# Altium PCB UZ_PER_loopback_tutorial.PcbDoc
Units mm, origin at the board's own origin, x right, y up, seen from the top; angles counter-clockwise.
Board outline 100 x 100 mm, 2 copper layers (Top Layer, Bottom Layer); 104 components, 84 nets, 343 pads, 0 vias.
Unrouted connection lines stored in the file: 133.
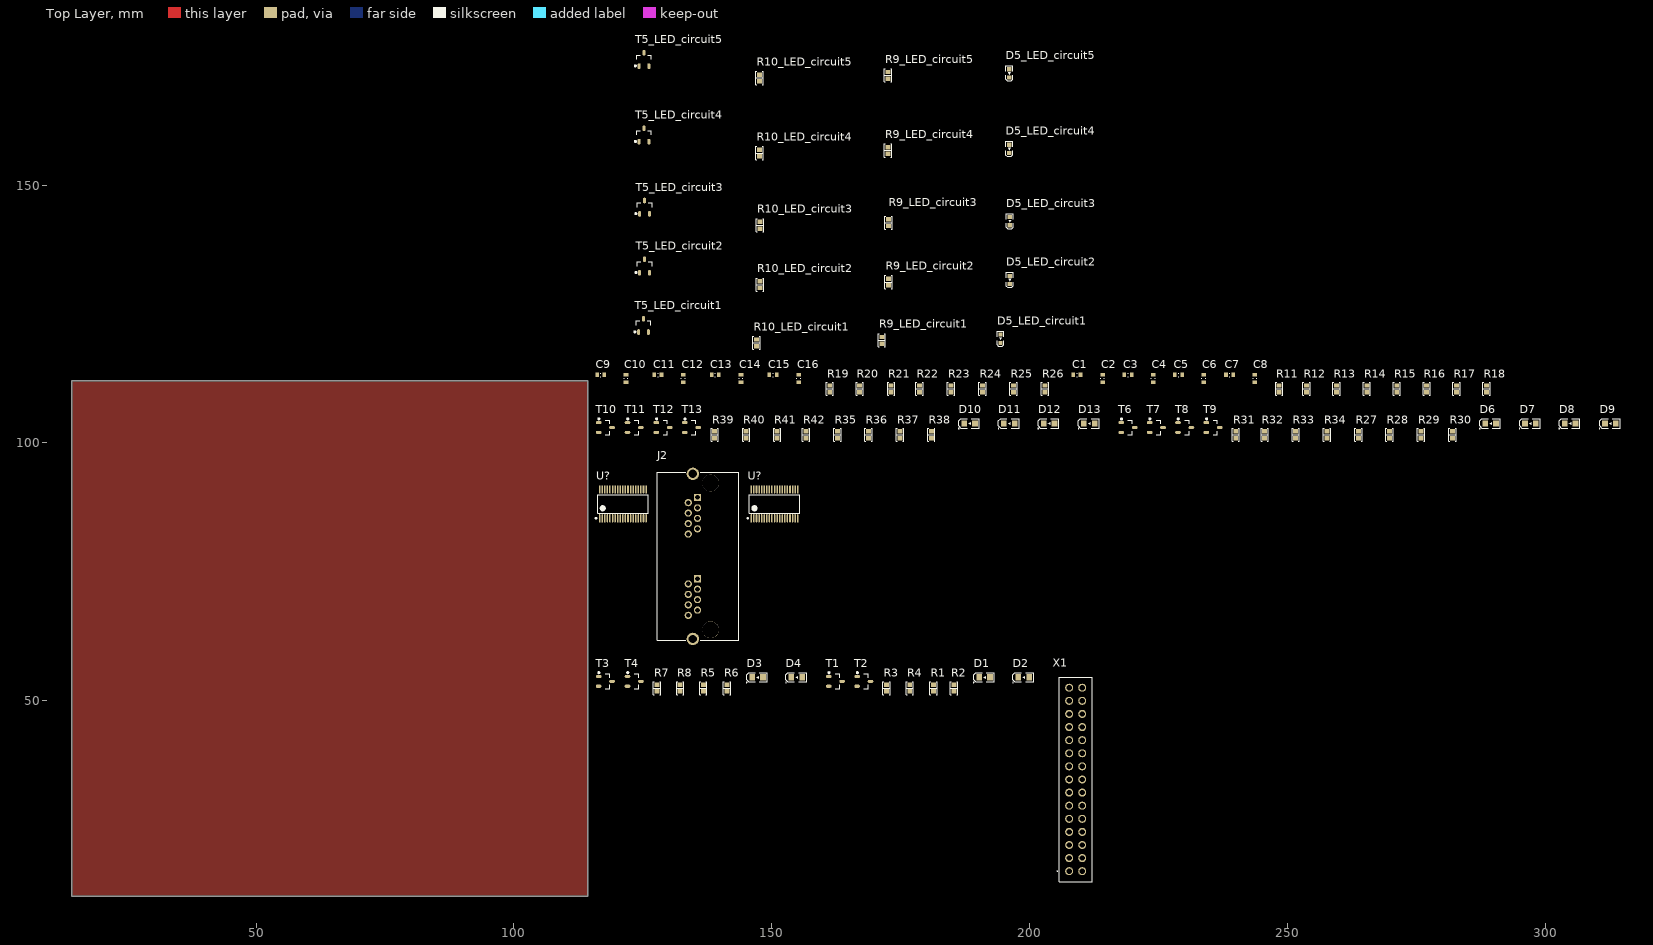
[diagram p0: Top Layer view]
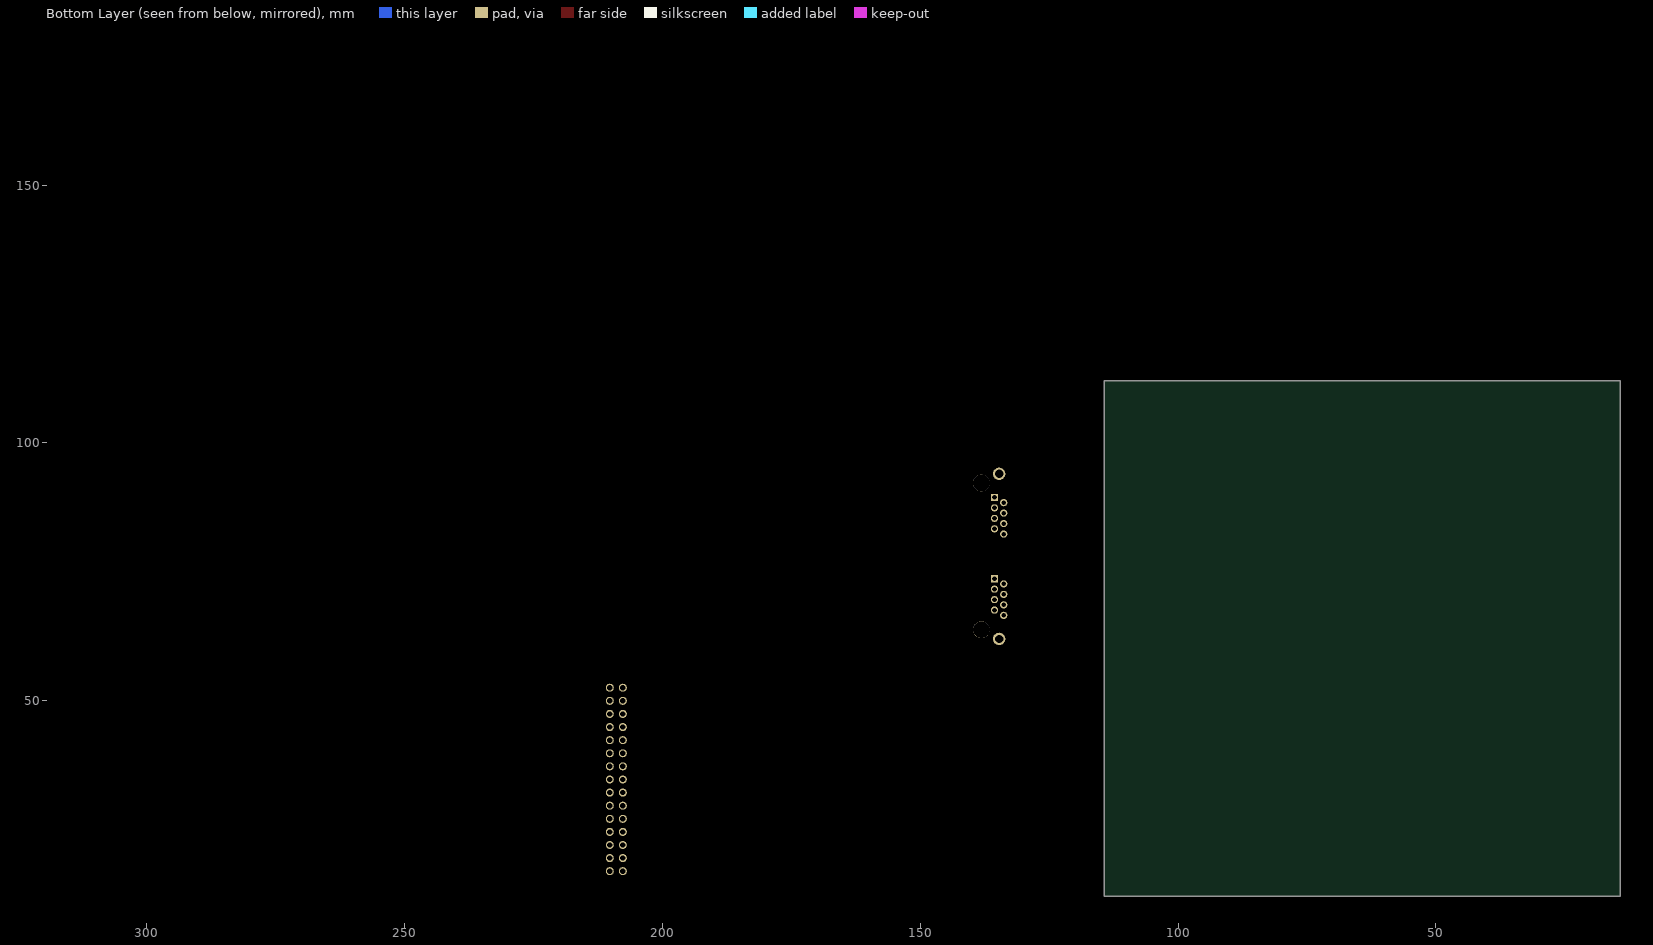
[diagram p1: Bottom Layer view, seen from below]

## Layer stack, top to bottom
Top Solder: solder mask 0.0102, Solder Resist, Dk 3.5
Top Layer: signal copper 0.0356
Dielectric 1: dielectric 0.32, FR-4, Dk 4.8
Bottom Layer: signal copper 0.0356
Bottom Solder: solder mask 0.0102, Solder Resist, Dk 3.5

## Board outline
14.3,12.1 114.3,12.1 114.3,112.1 14.3,112.1

## Design rules (kind name [scope] priority, off if disabled: settings)
BoardOutlineClearance [All] p1: gap=0.2 ignorepadtopadclearanceinfootprint=FALSE except(0.4: Arc-SplitBarrior Arc-SplitContinuation Track-SplitBarrior Track-SplitContinuation SMDPad-SplitBarrior SMDPad-SplitContinuation THPad-SplitBarrior THPad-SplitContinuation Via-SplitBarrior Via-SplitContinuation Fill-SplitBarrior Fill-SplitContinuation Poly-SplitBarrior Poly-SplitContinuation Region-SplitBarrior Region-SplitContinuation Text-SplitBarrior Text-SplitContinuation)
Clearance "Clearance Bottom Layer" [OnLayer('Bottom Layer')] p1: gap=0.203 ignorepadtopadclearanceinfootprint=TRUE except(0.254: Arc-Text Track-Text SMDPad-Text THPad-Text Via-Text Fill-Text Poly-Text Region-Text Text-Text)
Clearance "Clearance Top Layer" [OnLayer('Top Layer')] p2: gap=0.203 ignorepadtopadclearanceinfootprint=TRUE except(0.254: Arc-Text Track-Text SMDPad-Text THPad-Text Via-Text Fill-Text Poly-Text Region-Text Text-Text)
Clearance [All] p3: gap=0.2 ignorepadtopadclearanceinfootprint=FALSE except(0.089: Arc-Arc Arc-Track Arc-SMDPad Track-Track Track-SMDPad SMDPad-SMDPad; 0.127: Arc-Via Track-Via SMDPad-Via THPad-Via Via-Via; 0.254: Arc-Text Track-Text SMDPad-Text THPad-Text Via-Text Fill-Text Poly-Text Region-Text Text-Text)
HoleSize [All] p1: absolutevalues=TRUE maxlimit=6.3 minlimit=0.2 maxpercent=80.000 minpercent=20.000
MinimumAnnularRing [All] p1: minimumring=0.076
MinimumSolderMaskSliver [All] p1: minsoldermaskwidth=0.1
PolygonConnect PolygonConnect_1 [All] p1: thpad.connectstyle=Relief thpad.reliefconductorwidth=0.508 thpad.reliefentries=4 thpad.polygonreliefangle="90 Angle" thpad.airgapwidth=0.254 smdpad.connectstyle=Relief smdpad.reliefconductorwidth=0.508 smdpad.reliefentries=4 smdpad.polygonreliefangle="90 Angle" smdpad.airgapwidth=0.254 via.connectstyle=Direct via.reliefconductorwidth=0.508 via.reliefentries=4 via.polygonreliefangle="90 Angle" via.airgapwidth=0.254
RoomDefinition LowPass_Filter [InComponentClass('LowPass_Filter')] p1: confinementstyle=ConfineIn formatcopy=TRUE lockcomponents=FALSE outline 115.4,108.9 292.199,108.9 292.199,116.6 115.4,116.6
RoomDefinition LEDcircuits_Phase [InComponentClass('LEDcircuits_Phase')] p2: confinementstyle=ConfineIn formatcopy=TRUE lockcomponents=FALSE outline 115.4,100 316.799,100 316.799,107.7 115.4,107.7
RoomDefinition LED_circuit5 [InComponentClass('LED_circuit5')] p3: confinementstyle=ConfineIn formatcopy=TRUE lockcomponents=FALSE outline 115.3,169.15 217.3,169.15 217.3,179.45 115.3,179.45
RoomDefinition LED_circuit4 [InComponentClass('LED_circuit4')] p4: confinementstyle=ConfineIn formatcopy=TRUE lockcomponents=FALSE outline 115.3,154.6 217.3,154.6 217.3,164.8 115.3,164.8
RoomDefinition LED_circuit3 [InComponentClass('LED_circuit3')] p5: confinementstyle=ConfineIn formatcopy=TRUE lockcomponents=FALSE outline 115.4,140.6 217.4,140.6 217.4,150.8 115.4,150.8
RoomDefinition LED_circuit2 [InComponentClass('LED_circuit2')] p6: confinementstyle=ConfineIn formatcopy=TRUE lockcomponents=FALSE outline 115.4,129.1 217.4,129.1 217.4,139.4 115.4,139.4
RoomDefinition LED_circuit1 [InComponentClass('LED_circuit1')] p7: confinementstyle=ConfineIn formatcopy=TRUE lockcomponents=FALSE outline 115.5,117.8 215.1,117.8 215.1,127.9 115.5,127.9
RoomDefinition Ethernet_Connector [InComponentClass('Ethernet_Connector')] p8: confinementstyle=ConfineIn formatcopy=TRUE lockcomponents=FALSE outline 115.5,59.8 155.9,59.8 155.9,98.8 115.5,98.8
RoomDefinition Connectors&PIN_Header [InComponentClass('Connectors&PIN_Header')] p9: confinementstyle=ConfineIn formatcopy=TRUE lockcomponents=FALSE outline 115.4,13.6 213.4,13.6 213.4,58.5 115.4,58.5
RoutingCorners [All] p1: cornerstyle=Round minsetback=2.54 maxsetback=2.54
RoutingVias [All] p1: holewidth=0.5 width=1 viastyle="Through Hole" minholewidth=0.2 minwidth=0.45 maxholewidth=1 maxwidth=2
SilkToSilkClearance [All] p1: silktosilkclearance=0.1
SilkToSolderMaskClearance [IsPad] p1: minsilkscreentomaskgap=0.1 clearancetoexposedcopper=TRUE
SolderMaskExpansion [All] p1: expansion=0.102 istentingtop=FALSE
Width [All] p1: maxlimit=2.54 minlimit=0.089 preferedwidth=0.381
25 further rules are at their usual default settings.

## Classes and differential pairs
channel class LED_circuits: LED_circuit1 LED_circuit2 LED_circuit3 LED_circuit4 LED_circuit5
component class LowPass_Filter: C1 C2 C3 C4 C5 C6 C7 C8 C9 C10 C11 C12 C13 C14 C15 C16 R11 R12 R13 R14 R15 R16 R17 R18 R19 R20 R21 R22 R23 R24 R25 R26
component class LEDcircuits_Phase: D6 D7 D8 D9 D10 D11 D12 D13 R27 R28 R29 R30 R31 R32 R33 R34 R35 R36 R37 R38 R39 R40 R41 R42 T6 T7 T8 T9 T10 T11 T12 T13
component class LED_circuit5: D5_LED_circuit5 R9_LED_circuit5 R10_LED_circuit5 T5_LED_circuit5
component class LED_circuit4: D5_LED_circuit4 R9_LED_circuit4 R10_LED_circuit4 T5_LED_circuit4
component class LED_circuit3: D5_LED_circuit3 R9_LED_circuit3 R10_LED_circuit3 T5_LED_circuit3
component class LED_circuit2: D5_LED_circuit2 R9_LED_circuit2 R10_LED_circuit2 T5_LED_circuit2
component class LED_circuit1: D5_LED_circuit1 R9_LED_circuit1 R10_LED_circuit1 T5_LED_circuit1
component class Ethernet_Connector: J1 J2 U?
component class Connectors&PIN_Header: D1 D2 D3 D4 R1 R2 R3 R4 R5 R6 R7 R8 T1 T2 T3 T4 X1 X2

## Components (designator, comment, footprint, x,y, rotation, side; value= is the part's Value field where it differs from the comment)
C1 "1 µF" C_0603 209.1,113.2 r0 top
C2 "0.1 µF" C_0603 214.1,112.5 r90 top
C3 "1 µF" C_0603 219,113.2 r0 top
C4 "0.1 µF" C_0603 223.9,112.5 r90 top
C5 "1 µF" C_0603 228.8,113.2 r0 top
C6 "0.1 µF" C_0603 233.7,112.5 r90 top
C7 "1 µF" C_0603 238.7,113.2 r0 top
C8 "0.1 µF" C_0603 243.6,112.5 r90 top
C9 "1 µF" C_0603 116.8,113.2 r0 top
C10 "0.1 µF" C_0603 121.7,112.5 r90 top
C11 "1 µF" C_0603 127.9,113.2 r0 top
C12 "0.1 µF" C_0603 132.8,112.5 r90 top
C13 "1 µF" C_0603 139,113.2 r0 top
C14 "0.1 µF" C_0603 144,112.5 r90 top
C15 "1 µF" C_0603 150.2,113.2 r0 top
C16 "0.1 µF" C_0603 155.2,112.5 r90 top
D1 "NCD0805R1" LEDM2012X80N 191.2,54.6 r0 top
D2 "NCD0805R1" LEDM2012X80N 198.8,54.6 r0 top
D3 "NCD0805R1" LEDM2012X80N 147.2,54.6 r0 top
D4 "NCD0805R1" LEDM2012X80N 154.8,54.6 r0 top
D5_LED_circuit1 "NCD0603W1" WL-SMCW_0603 194.3,120.2 r90 top (schematic designator D5)
D5_LED_circuit2 "NCD0603W1" WL-SMCW_0603 196.1,131.6 r90 top (schematic designator D5)
D5_LED_circuit3 "NCD0603W1" WL-SMCW_0603 196.1,143 r90 top (schematic designator D5)
D5_LED_circuit4 "NCD0603W1" WL-SMCW_0603 196,157 r90 top (schematic designator D5)
D5_LED_circuit5 "NCD0603W1" WL-SMCW_0603 196,171.65 r90 top (schematic designator D5)
D6 "NCD0805B2" LEDM2012X80N 289.299,103.8 r0 top
D7 "NCD0805B2" LEDM2012X80N 296.999,103.8 r0 top
D8 "NCD0805B2" LEDM2012X80N 304.699,103.8 r0 top
D9 "NCD0805B2" LEDM2012X80N 312.499,103.8 r0 top
D10 "NCD0805B2" LEDM2012X80N 188.3,103.8 r0 top
D11 "NCD0805B2" LEDM2012X80N 196,103.8 r0 top
D12 "NCD0805B2" LEDM2012X80N 203.7,103.8 r0 top
D13 "NCD0805B2" LEDM2012X80N 211.5,103.8 r0 top
J2 "RJHSE538002" RJHSE-5380-02 138.1,63.8 r90 top
R1 "2k7" "RES 0603_1608" 181.3,52.5 r90 top
R2 "2k7" "RES 0603_1608" 185.3,52.5 r90 top
R3 "10k" "RES 0603_1608" 172.2,52.5 r90 top
R4 "10k" "RES 0603_1608" 176.7,52.5 r90 top
R5 "2k7" "RES 0603_1608" 136.7,52.5 r90 top
R6 "2k7" "RES 0603_1608" 141.3,52.5 r90 top
R7 "10k" "RES 0603_1608" 127.7,52.5 r90 top
R8 "10k" "RES 0603_1608" 132.2,52.5 r90 top
R9_LED_circuit1 "2k7" "RES 0603_1608" 171.3,119.9 r90 top (schematic designator R9)
R9_LED_circuit2 "2k7" "RES 0603_1608" 172.6,131.2 r90 top (schematic designator R9)
R9_LED_circuit3 "2k7" "RES 0603_1608" 172.6,142.7 r90 top (schematic designator R9)
R9_LED_circuit4 "2k7" "RES 0603_1608" 172.5,156.7 r90 top (schematic designator R9)
R9_LED_circuit5 "2k7" "RES 0603_1608" 172.5,171.25 r90 top (schematic designator R9)
R10_LED_circuit1 "10k" "RES 0603_1608" 147,119.4 r90 top (schematic designator R10)
R10_LED_circuit2 "10k" "RES 0603_1608" 147.7,130.7 r90 top (schematic designator R10)
R10_LED_circuit3 "10k" "RES 0603_1608" 147.7,142.2 r90 top (schematic designator R10)
R10_LED_circuit4 "10k" "RES 0603_1608" 147.6,156.2 r90 top (schematic designator R10)
R10_LED_circuit5 "10k" "RES 0603_1608" 147.6,170.75 r90 top (schematic designator R10)
R11 "1k" "RES 0603_1608" 248.3,110.5 r90 top
R12 "10k" "RES 0603_1608" 253.599,110.5 r90 top
R13 "1k" "RES 0603_1608" 259.399,110.5 r90 top
R14 "10k" "RES 0603_1608" 265.299,110.5 r90 top
R15 "1k" "RES 0603_1608" 271.099,110.5 r90 top
R16 "10k" "RES 0603_1608" 276.899,110.5 r90 top
R17 "1k" "RES 0603_1608" 282.699,110.5 r90 top
R18 "10k" "RES 0603_1608" 288.499,110.5 r90 top
R19 "1k" "RES 0603_1608" 161.2,110.5 r90 top
R20 "10k" "RES 0603_1608" 167,110.5 r90 top
R21 "1k" "RES 0603_1608" 173.1,110.5 r90 top
R22 "10k" "RES 0603_1608" 178.6,110.5 r90 top
R23 "1k" "RES 0603_1608" 184.7,110.5 r90 top
R24 "10k" "RES 0603_1608" 190.8,110.5 r90 top
R25 "1k" "RES 0603_1608" 196.8,110.5 r90 top
R26 "10k" "RES 0603_1608" 202.9,110.5 r90 top
R27 "2k7" "RES 0603_1608" 263.699,101.6 r90 top
R28 "2k7" "RES 0603_1608" 269.699,101.6 r90 top
R29 "2k7" "RES 0603_1608" 275.799,101.6 r90 top
R30 "2k7" "RES 0603_1608" 281.899,101.6 r90 top
R31 "10k" "RES 0603_1608" 239.9,101.6 r90 top
R32 "10k" "RES 0603_1608" 245.5,101.6 r90 top
R33 "10k" "RES 0603_1608" 251.499,101.6 r90 top
R34 "10k" "RES 0603_1608" 257.599,101.6 r90 top
R35 "2k7" "RES 0603_1608" 162.7,101.6 r90 top
R36 "2k7" "RES 0603_1608" 168.7,101.6 r90 top
R37 "2k7" "RES 0603_1608" 174.8,101.6 r90 top
R38 "2k7" "RES 0603_1608" 180.9,101.6 r90 top
R39 "10k" "RES 0603_1608" 138.9,101.6 r90 top
R40 "10k" "RES 0603_1608" 145,101.6 r90 top
R41 "10k" "RES 0603_1608" 151,101.6 r90 top
R42 "10k" "RES 0603_1608" 156.6,101.6 r90 top
T1 "MMBT3904-7-F" SOT95P280X145-3N 162.3,53.8 r0 top value="40 V"
T2 "MMBT3904-7-F" SOT95P280X145-3N 167.8,53.8 r0 top value="40 V"
T3 "MMBT3904-7-F" SOT95P280X145-3N 117.7,53.8 r0 top value="40 V"
T4 "MMBT3904-7-F" SOT95P280X145-3N 123.3,53.8 r0 top value="40 V"
T5_LED_circuit1 "MMBT3904-7-F" SOT95P280X145-3N 125.1,122.8 r90 top value="40 V" (schematic designator T5)
T5_LED_circuit2 "MMBT3904-7-F" SOT95P280X145-3N 125.3,134.3 r90 top value="40 V" (schematic designator T5)
T5_LED_circuit3 "MMBT3904-7-F" SOT95P280X145-3N 125.3,145.7 r90 top value="40 V" (schematic designator T5)
T5_LED_circuit4 "MMBT3904-7-F" SOT95P280X145-3N 125.2,159.7 r90 top value="40 V" (schematic designator T5)
T5_LED_circuit5 "MMBT3904-7-F" SOT95P280X145-3N 125.2,174.35 r90 top value="40 V" (schematic designator T5)
T6 "MMBT3904-7-F" SOT95P280X145-3N 219,103 r0 top value="40 V"
T7 "MMBT3904-7-F" SOT95P280X145-3N 224.5,103 r0 top value="40 V"
T8 "MMBT3904-7-F" SOT95P280X145-3N 230,103 r0 top value="40 V"
T9 "MMBT3904-7-F" SOT95P280X145-3N 235.5,103 r0 top value="40 V"
T10 "MMBT3904-7-F" SOT95P280X145-3N 117.7,103 r0 top value="40 V"
T11 "MMBT3904-7-F" SOT95P280X145-3N 123.3,103 r0 top value="40 V"
T12 "MMBT3904-7-F" SOT95P280X145-3N 128.9,103 r0 top value="40 V"
T13 "MMBT3904-7-F" SOT95P280X145-3N 134.4,103 r0 top value="40 V"
U? "THS4524IDBTR" THS4524 150.5,88.2 r90 top value=Rail-to-Rail
U? "THS4524IDBTR" THS4524 121.1,88.2 r90 top value=Rail-to-Rail
X1 "IPL1-115-01-L-D-K" IPL1-115-01-YYY-D-K 207.6,17 r90 top

## Footprints (in the part's own frame and the unit in brackets; to place one, negate y for a bottom-side part, rotate by r counter-clockwise, add the part's x,y. Pads: shape width x height; smd on the part's side, far side on the other; paste and mask are expansions set on the pad)
C_0603 [mm] "Chip Capacitor, Body 1.6x0.8mm, Height 1.0mm, IPC High Density"
  rect 0.7x0.9 smd: 1(-0.7,0) 2(0.7,0)
  silkscreen extent -0.05,-0.35 0.05,0.35, body extent -0.87,-0.47 0.88,0.48, height 1
IPL1-115-01-YYY-D-K [mm]
  round 1.55 hole 1.02: 1(0,0) 2(2.54,0) 3(5.08,0) 4(7.62,0) 5(10.16,0) 6(12.7,0) 7(15.24,0) 8(17.78,0) 9(20.32,0) 10(22.86,0) 11(25.4,0) 12(27.94,0) 13(30.48,0) 14(33.02,0) 15(35.56,0) 16(0,-2.54) 17(2.54,-2.54) 18(5.08,-2.54) 19(7.62,-2.54) 20(10.16,-2.54) 21(12.7,-2.54) 22(15.24,-2.54) 23(17.78,-2.54) 24(20.32,-2.54) 25(22.86,-2.54) 26(25.4,-2.54) 27(27.94,-2.54) 28(30.48,-2.54) 29(33.02,-2.54) 30(35.56,-2.54)
  silkscreen extent -2.03,-4.44 37.59,2.35, body extent -2.03,-5.46 37.59,2.41, height 8.13
LEDM2012X80N [mm]
  rect 1.1x1.2 smd: 1(-1.05,0) 2(1.05,0)
  silkscreen extent -2.16,-1.06 1.9,0.9, body extent -1,-0.62 1,0.63, height 0.7
"RES 0603_1608" [mm] "Chip Resistor, 2-Leads, Body 1.60x0.80mm, IPC Medium Density"
  rect 0.85x0.95 smd: 1(-0.65,0) 2(0.65,0)
  silkscreen extent -1.27,-0.7 1.27,0.7, body extent -0.8,-0.4 0.8,0.4, height 0.45
RJHSE-5380-02 [mm] "Modular Jack Horizontal Shielded Dual Port 8P8C Tab Up"
  rect 1.4x1.4 hole 0.9: A1(9.906,2.54) B1(25.654,2.54)
  round 1.4 hole 0.9: A2(8.89,4.318) A3(7.874,2.54) A4(6.858,4.318) A5(5.842,2.54) A6(4.826,4.318) A7(3.81,2.54) A8(2.794,4.318) B2(24.638,4.318) B3(23.622,2.54) B4(22.606,4.318) B5(21.59,2.54) B6(20.574,4.318) B7(19.558,2.54) B8(18.542,4.318)
  round 3.25 hole 3.25 unplated: MH1(0,0) MH2(28.448,0)
  round 2.4 hole 1.6: S1(-1.778,3.429) S2(30.226,3.429)
  silkscreen extent -2.03,-5.46 30.48,10.29, body extent -3.5,-5.41 31.95,10.29, height 15.06
SOT95P280X145-3N [mm] "SOT23, 3-Leads, Body 3,0x3,0mm (max), Pitch 0,95mm, IPC Medium Density"
  oval 1.1x0.6 smd: 1(-1.3,0.95) 2(-1.3,-0.95) 3(1.3,0)
  silkscreen extent -1.4,-1.45 0.85,1.82, body extent -1.25,-1.46 1.23,1.46, height 1.01
THS4524 [mm] "THS4524 4Ch Dif Amp, TSSOP"
  oval 1.6x0.3 smd mask+0.05: 1(-2.8,4.5) 2(-2.8,4) 3(-2.8,3.5) 4(-2.8,3) 5(-2.8,2.5) 6(-2.8,2) 7(-2.8,1.5) 8(-2.8,1) 9(-2.8,0.5) 10(-2.8,0) 11(-2.8,-0.5) 12(-2.8,-1) 13(-2.8,-1.5) 14(-2.8,-2) 15(-2.8,-2.5) 16(-2.8,-3) 17(-2.8,-3.5) 18(-2.8,-4) 19(-2.8,-4.5) 20(2.8,-4.5) 21(2.8,-4) 22(2.8,-3.5) 23(2.8,-3) 24(2.8,-2.5) 25(2.8,-2) 26(2.8,-1.5) 27(2.8,-1) 28(2.8,-0.5) 29(2.8,0) 30(2.8,0.5) 31(2.8,1) 32(2.8,1.5) 33(2.8,2) 34(2.8,2.5) 35(2.8,3) 36(2.8,3.5) 37(2.8,4) 38(2.8,4.5)
  silkscreen extent -2.92,-4.9 1.8,5.32, body extent -2.25,-4.9 2.25,4.9, height 1.2
WL-SMCW_0603 [mm] "SMD Mono-color Chip LED, body 1.6x0.8mm"
  rect 0.8x0.8 smd: 1(-0.8,0) 2(0.8,0)
  silkscreen extent -1.45,-0.65 1.45,0.65, body extent -0.8,-0.4 0.8,0.4, height 0.7

## Part data
C1 C3 C5 C7 C9 C11 C13 C15: library part C0603C105K3RAC7411, "Capacitor 0603, 25 VDC, 1 µF, X7R", Device Package=0603, Manufacturer=KEMET, Operating Temperature="-55 - 125°C", Supplier Part Number 1=80-C0603C105K3RLR, Tolerance="10 %", Voltage Rating="25 VDC", Component Type="Capacitor 0603", ComponentLink1Description=Datasheet, ComponentLink1URL=https://www.mouser.de/datasheet/2/212/KEM_C1002_X7R_SMD-1102033.pdf, Created from=MGremer, Created On="20.12.2020 13:54:13", Last Updated="20.12.2020 16:43:05", Live Cycle Status=1, Manufacturer Part Number=C0603C105K3RAC7411, Mounting Type=SMD, PartID=4, Series="SMD Comm X7R", Stock number="Labor SMD Container", Supplier 1=Mouser, Type=Capacitor
C2 C4 C6 C8 C10 C12 C14 C16: library part C0603X104K5RAC7411, "Capacitor 0603, 50 VDC, 0.1 µF, X7R", Device Package=0603, LCSC Part Number=C14663, Manufacturer=KEMET, Operating Temperature="-55 - 125°C", Supplier Part Number 1=80-C0603X104K5R7411, Tolerance="10 %", Voltage Rating="50 VDC", Component Type="Capacitor 0603", ComponentLink1Description=Datasheet, ComponentLink1URL=https://www.mouser.de/datasheet/2/212/1/KEM_C1013_X7R_FT_CAP_SMD-1103280.pdf, Created from=MGremer, Created On="20.12.2020 13:54:13", Last Updated="04.03.2021 09:24:28", Live Cycle Status=1, Manufacturer Part Number=C0603X104K5RAC7411, Mounting Type=SMD, PartID=3, Series="SMD Comm X7R Flex", Stock number="Labor SMD Container", Supplier 1=Mouser, Supplier 2=LCSC, Supplier Part Number 2=C14663, Type=Capacitor
D1 D2 D3 D4: "Red 0805 Light Emitting Diodes (LED) ROHS", Color=red, Device Package=0805, Forward Current I_f="25 mA", Forward Voltage U_f="2 V", LCSC Part Number=C84256, Manufacturer="Foshan NationStar Optoelectronics", Nominal Power="65 mW", Operating Temperature="-40 - 85 °C", Component Type="LED Diode", ComponentLink1Description=Datasheet, ComponentLink1URL=https://datasheet.lcsc.com/lcsc/2008201032_Foshan-NationStar-Optoelectronics-NCD0805R1_C84256.pdf, Created from=NDiringer, Created On="06.05.2022 14:12:36", Last Updated="06.05.2022 14:16:32", Light Intensity="115 mcd", Live Cycle Status=1, Manufacturer Part Number=NCD0805R1, Mounting Type=SMD, PartID=14, Stock number="not stored", Supplier 1=LCSC, Supplier Part Number 1=C84256, Type=Standard, Wavelength="620 nm"
D5_LED_circuit1 D5_LED_circuit2 D5_LED_circuit3 D5_LED_circuit4 D5_LED_circuit5: "White light 0603 Light Emitting Diodes (LED) ROHS", Color=white, Device Package=0603, Forward Current I_f="20 mA", Forward Voltage U_f="2.8 V", LCSC Part Number=C84265, Manufacturer="Foshan NationStar Optoelectronics", Nominal Power="72 mW", Operating Temperature="-40 - 85 °C", Component Type="LED Diode", ComponentLink1Description=Datasheet, ComponentLink1URL=https://datasheet.lcsc.com/lcsc/2008201032_Foshan-NationStar-Optoelectronics-NCD0603W1_C84265.pdf, Created from=NDiringer, Created On="03.05.2022 13:11:03", Last Updated="03.05.2022 13:27:48", Light Intensity="250 mcd", Live Cycle Status=1, Manufacturer Part Number=NCD0603W1, Mounting Type=SMD, PartID=13, Stock number="not stored", Supplier 1=LCSC, Supplier Part Number 1=C84265, Type=Standard
D6 D7 D8 D9 D10 D11 D12 D13: "Blue 0805 Light Emitting Diodes (LED) ROHS", Color=blue, Device Package=0805, Forward Current I_f="20 mA", Forward Voltage U_f="2.7 V", LCSC Part Number=C84259, Manufacturer="Foshan NationStar Optoelectronics", Nominal Power="72 mW", Operating Temperature="-40 - 85 °C", Component Type="LED Diode", ComponentLink1Description=Datasheet, ComponentLink1URL=https://datasheet.lcsc.com/lcsc/2008201032_Foshan-NationStar-Optoelectronics-NCD0805B2_C84259.pdf, Created from=NDiringer, Created On="06.05.2022 14:16:21", Last Updated="06.05.2022 14:17:19", Light Intensity="36 mcd", Live Cycle Status=1, Manufacturer Part Number=NCD0805B2, Mounting Type=SMD, PartID=15, Stock number="not stored", Supplier 1=LCSC, Supplier Part Number 1=C84259, Type=Standard, Wavelength="472 nm"
J2: "CAT5, RJ45 Connector, 1x2", Device Package=RJ45, Manufacturer=Amphenol, Supplier Part Number 1=1860605, Component Type="RJ45 Connector", ComponentLink1Description=Datasheet, ComponentLink1URL=https://www.farnell.com/cad/2360382.pdf, Created from=MGremer, Created On="22.02.2021 16:43:38", Last Updated="22.02.2021 16:43:38", Live Cycle Status=1, Manufacturer Part Number=RJHSE538002, Mounting Type=THT, PartID=4, Series=RJHSE, Stock number="not stored", Supplier 1=Farnell, Type="RJ45 Connector"
R1 R2 R5 R6 R9_LED_circuit1 R9_LED_circuit2 R9_LED_circuit3 R9_LED_circuit4 R9_LED_circuit5 R27 R28 R29 R30 R35 R36 R37 R38: library part RK73B1JTTDD272J, "SMD resistor E24 series", Device Package=0603, Manufacturer="KOA Speer", Supplier Part Number 1=660-RK73B1JTTDD272J, Tolerance=5%, Component Type="SMD resistor", ComponentLink1Description=Datasheet, ComponentLink1URL=https://www.mouser.de/datasheet/2/219/RK73B-1825463.pdf, Created from=MGremer, Created On="14.12.2020 16:17:14", Last Updated="02.03.2021 14:07:32", Live Cycle Status=1, Manufacturer Part Number=RK73B1JTTDD272J, Mounting Type=SMD, PartID=84, Stock number="Labor SMD Container", Supplier 1=Mouser, Type=Resistor
R3 R4 R7 R8 R10_LED_circuit1 R10_LED_circuit2 R10_LED_circuit3 R10_LED_circuit4 R10_LED_circuit5 R12 R14 R16 R18 R20 R22 R24 R26 R31 R32 R33 R34 R39 R40 R41 R42: library part RK73B1JTTD103J, "SMD resistor E24 series", Device Package=0603, Manufacturer="KOA Speer", Supplier Part Number 1=660-RK73B1JTTD103J, Tolerance=5%, Component Type="SMD resistor", ComponentLink1Description=Datasheet, ComponentLink1URL=https://www.mouser.de/datasheet/2/219/RK73B-1825463.pdf, Created from=MGremer, Created On="14.12.2020 16:17:14", Last Updated="02.03.2021 14:07:32", Live Cycle Status=1, Manufacturer Part Number=RK73B1JTTD103J, Mounting Type=SMD, PartID=98, Stock number="Labor SMD Container", Supplier 1=Mouser, Type=Resistor
R11 R13 R15 R17 R19 R21 R23 R25: library part RK73B1JTTDD102J, "SMD resistor E24 series", Device Package=0603, Manufacturer="KOA Speer", Supplier Part Number 1=660-RK73B1JTTDD102J, Tolerance=5%, Component Type="SMD resistor", ComponentLink1Description=Datasheet, ComponentLink1URL=https://www.mouser.de/datasheet/2/219/RK73B-1825463.pdf, Created from=MGremer, Created On="14.12.2020 16:17:14", Last Updated="02.03.2021 14:07:32", Live Cycle Status=1, Manufacturer Part Number=RK73B1JTTDD102J, Mounting Type=SMD, PartID=74, Stock number="Labor SMD Container", Supplier 1=Mouser, Type=Resistor
T1 T2 T3 T4 T5_LED_circuit1 T5_LED_circuit2 T5_LED_circuit3 T5_LED_circuit4 T5_LED_circuit5 T6 T7 T8 T9 T10 T11 T12 T13: "Bipolartransistor, NPN, 40 V, 60 Vceo, 6 Vebo, 200 mA", Collector Basis Voltage="60 V", Collector Emitter Voltage="40 V", Device Package=SOT-23-3, Manufacturer="Diodes Incorporated", Operating Temperature="-55 - 150 °C", Power Dissipation="310 mW", Supplier Part Number 1=621-MMBT3904-F, Component Type=Bipolartransistor, ComponentLink1Description=Datasheet, ComponentLink1URL=https://www.mouser.de/datasheet/2/115/ds30036-41708.pdf, Created from=MGremer, Created On="07.01.2021 09:55:32", Last Updated="07.01.2021 09:55:32", Live Cycle Status=1, Manufacturer Part Number=MMBT3904-7-F, Mounting Type=SMD, Number Of Channels=single, PartID=1, Polarization=NPN, Series=MMBT3904, Supplier 1=Mouser, Type=Bipolartransistor
U? U?: "Differential Amplifier, Very Low Power, Negative Rail Input", Device Package=TSSOP-38, Manufacturer="Texas Instruments", Operating Temperature="-40 - 85 °C", Supplier Part Number 1=595-THS4524IDBTR, Channels=4, CMRR="80 - 102 dB", Component Type="Differential Amplifier", ComponentLink1Description=Datasheet, ComponentLink1URL=https://www.ti.com/lit/ds/symlink/ths4524.pdf?HQS=dis-mous-null-mousermode-dsf-pf-null-wwe&ts=1610629243115&ref_url=https%253A%252F%252Fwww.mouser.de%252F, Created from=MGremer, Created On="15.01.2021 11:55:32", GBP="145 MHz", Last Updated="24.02.2021 14:38:25", Live Cycle Status=1, Manufacturer Part Number=THS4524IDBTR, Mounting Type=SMD, PartID=2, Stock number="not stored", Supplier 1=Mouser, Type="Differential Amplifiers"
X1: "2.54 mm Double Row Terminal Assembly", Device Package=Connector, Manufacturer=SAMTEC, Component Type="Samtec Connector", ComponentLink1Description=Homepage, ComponentLink1URL=https://www.samtec.com/de/products/ipl1, Created from=MGremer, Created On="01.12.2020 18:14:32", Last Updated="15.02.2021 10:08:03", Live Cycle Status=1, Manufacturer Part Number=IPL1-115-01-L-D-K, Mounting Type=THT, Number of positions=30, Number of rows=2, PartID=28, Stock number="not stored", Supplier 1=SAMTEC, Supplier Part Number 1=IPL1-115-01-L-D-K, Type=Connector

## Nets (pads, with @x,y where several pads share a name; then routed paths per layer and width w, separated by ;. In a path a pad name is that pad's centre, name@x,y a point inside that pad or via, vN(x,y) a via of type N, cw(c..) or ccw(c..) an arc to the next point about the centre after c; other vN are vias at no path point)
3V3_PER: R8.2
5V_PER: R7.2
15V: R4.2 X1.10
24V: D1.2 D2.2 D3.2 D4.2 D5_LED_circuit1.2 D5_LED_circuit2.2 D5_LED_circuit3.2 D5_LED_circuit4.2 D5_LED_circuit5.2 D6.2 D7.2 D8.2 D9.2 D10.2 D11.2 D12.2 D13.2 R3.2 X1.1
GND: C1.1 C2.1 C3.1 C4.1 C5.1 C6.1 C7.1 C8.1 C9.1 C10.1 C11.1 C12.1 C13.1 C14.1 C15.1 C16.1 T1.2 T2.2 T3.2 T4.2 T5_LED_circuit1.2 T5_LED_circuit2.2 T5_LED_circuit3.2 T5_LED_circuit4.2 T5_LED_circuit5.2 T6.2 T7.2 T8.2 T9.2 T10.2 T11.2 T12.2 T13.2 X1.16 X1.17 X1.25
NetC1_2: C1.2 R11.1 R12.2
NetC3_2: C3.2 R13.1 R14.2
NetC5_2: C5.2 R15.1 R16.2
NetC7_2: C7.2 R17.1 R18.2
NetC9_2: C9.2 R19.1 R20.2
NetC11_2: C11.2 R21.1 R22.2
NetC13_2: C13.2 R23.1 R24.2
NetC15_2: C15.2 R25.1 R26.2
NetD1_1: D1.1 R1.1
NetD2_1: D2.1 R2.1
NetD3_1: D3.1 R5.1
NetD4_1: D4.1 R6.1
NetD5_LED_circuit1_1: D5_LED_circuit1.1 R9_LED_circuit1.1
NetD5_LED_circuit2_1: D5_LED_circuit2.1 R9_LED_circuit2.1
NetD5_LED_circuit3_1: D5_LED_circuit3.1 R9_LED_circuit3.1
NetD5_LED_circuit4_1: D5_LED_circuit4.1 R9_LED_circuit4.1
NetD5_LED_circuit5_1: D5_LED_circuit5.1 R9_LED_circuit5.1
NetD6_1: D6.1 R27.1
NetD7_1: D7.1 R28.1
NetD8_1: D8.1 R29.1
NetD9_1: D9.1 R30.1
NetD10_1: D10.1 R35.1
NetD11_1: D11.1 R36.1
NetD12_1: D12.1 R37.1
NetD13_1: D13.1 R38.1
NetR1_2: R1.2 T1.3
NetR2_2: R2.2 T2.3
NetR3_1: R3.1 T1.1
NetR4_1: R4.1 T2.1
NetR5_2: R5.2 T3.3
NetR6_2: R6.2 T4.3
NetR7_1: R7.1 T3.1
NetR8_1: R8.1 T4.1
NetR9_LED_circuit1_2: R9_LED_circuit1.2 T5_LED_circuit1.3
NetR9_LED_circuit2_2: R9_LED_circuit2.2 T5_LED_circuit2.3
NetR9_LED_circuit3_2: R9_LED_circuit3.2 T5_LED_circuit3.3
NetR9_LED_circuit4_2: R9_LED_circuit4.2 T5_LED_circuit4.3
NetR9_LED_circuit5_2: R9_LED_circuit5.2 T5_LED_circuit5.3
NetR10_LED_circuit1_1: R10_LED_circuit1.1 T5_LED_circuit1.1
NetR10_LED_circuit2_1: R10_LED_circuit2.1 T5_LED_circuit2.1
NetR10_LED_circuit3_1: R10_LED_circuit3.1 T5_LED_circuit3.1
NetR10_LED_circuit4_1: R10_LED_circuit4.1 T5_LED_circuit4.1
NetR10_LED_circuit5_1: R10_LED_circuit5.1 T5_LED_circuit5.1
NetR27_2: R27.2 T6.3
NetR28_2: R28.2 T7.3
NetR29_2: R29.2 T8.3
NetR30_2: R30.2 T9.3
NetR31_1: R31.1 T6.1
NetR32_1: R32.1 T7.1
NetR33_1: R33.1 T8.1
NetR34_1: R34.1 T9.1
NetR35_2: R35.2 T10.3
NetR36_2: R36.2 T11.3
NetR37_2: R37.2 T12.3
NetR38_2: R38.2 T13.3
NetR39_1: R39.1 T10.1
NetR40_1: R40.1 T11.1
NetR41_1: R41.1 T12.1
NetR42_1: R42.1 T13.1
PWM1_AH: R11.2 X1.2
PWM1_AH_filt: C2.2 R12.1
PWM2_AL: R23.2 X1.3
PWM2_AL_filt: C14.2 R24.1
PWM3_BH: R13.2 X1.4
PWM3_BH_filt: C4.2 R14.1
PWM4_BL: X1.5
PWM5_CH: R15.2 X1.6
PWM5_CH_filt: C6.2 R16.1
PWM6_CL: X1.7
PWM7_AH: R17.2
PWM7_AH_filt: C8.2 R18.1
PWM8_AL: R25.2
PWM8_AL_filt: C16.2 R26.1
PWM9_BH: R19.2
PWM9_BH_filt: C10.2 R20.1
PWM10_BL: 
PWM11_CH: R21.2
PWM11_CH_filt: C12.2 R22.1
PWM12_CL: 
pads on no net: J2.A1 J2.A2 J2.A3 J2.A4 J2.A5 J2.A6 J2.A7 J2.A8 J2.B1 J2.B2 J2.B3 J2.B4 J2.B5 J2.B6 J2.B7 J2.B8 J2.MH1 J2.MH2 J2.S1 J2.S2 R10_LED_circuit1.2 R10_LED_circuit2.2 R10_LED_circuit3.2 R10_LED_circuit4.2 R10_LED_circuit5.2 R31.2 R32.2 R33.2 R34.2 R39.2 R40.2 R41.2 R42.2 U?.1 U?.2 U?.3 U?.4 U?.5 U?.6 U?.7 U?.8 U?.9 U?.10 U?.11 U?.12 U?.13 U?.14 U?.15 U?.16 U?.17 U?.18 U?.19 U?.20 U?.21 U?.22 U?.23 U?.24 U?.25 U?.26 U?.27 U?.28 U?.29 U?.30 U?.31 U?.32 U?.33 U?.34 U?.35 U?.36 U?.37 U?.38 X1.8 X1.9 X1.11 X1.12 X1.13 X1.14 X1.15 X1.18 X1.19 X1.20 X1.21 X1.22 X1.23 X1.24 X1.26 X1.27 X1.28 X1.29 X1.30

## Polygon pours and split planes (outlines as drawn)
no net on Top Layer "NONET_L01_P000" (solid, pour order 0): 7.8,118.2 120.1,117.8 120.1,7.5 7.6,8

## Silkscreen, mask and mechanical layers (free items; w line width, h text height)
Mechanical 1:
  the board outline again, w0.2